# Altium PCB PCB1.PcbDoc
Units mm, origin at the board's own origin, x right, y up, seen from the top; angles counter-clockwise.
Board outline 75.18 x 42.29 mm, 2 copper layers (Top Layer, Bottom Layer); 11 components, 10 nets, 45 pads, 0 vias.
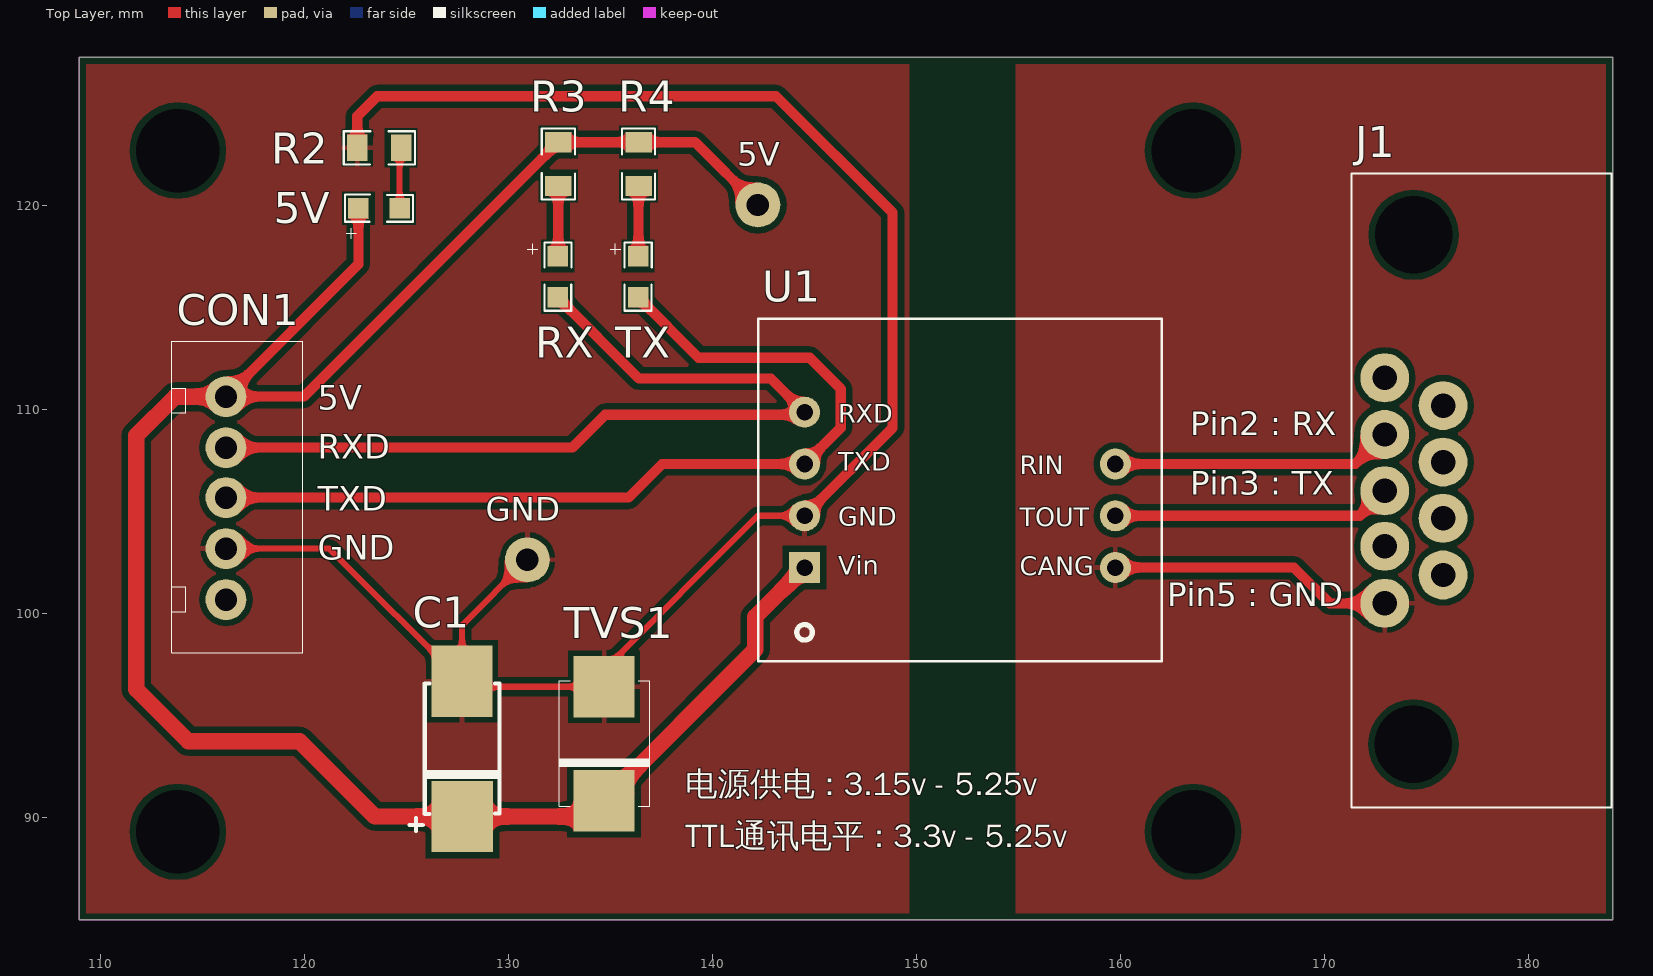
[diagram p0: Top Layer view]
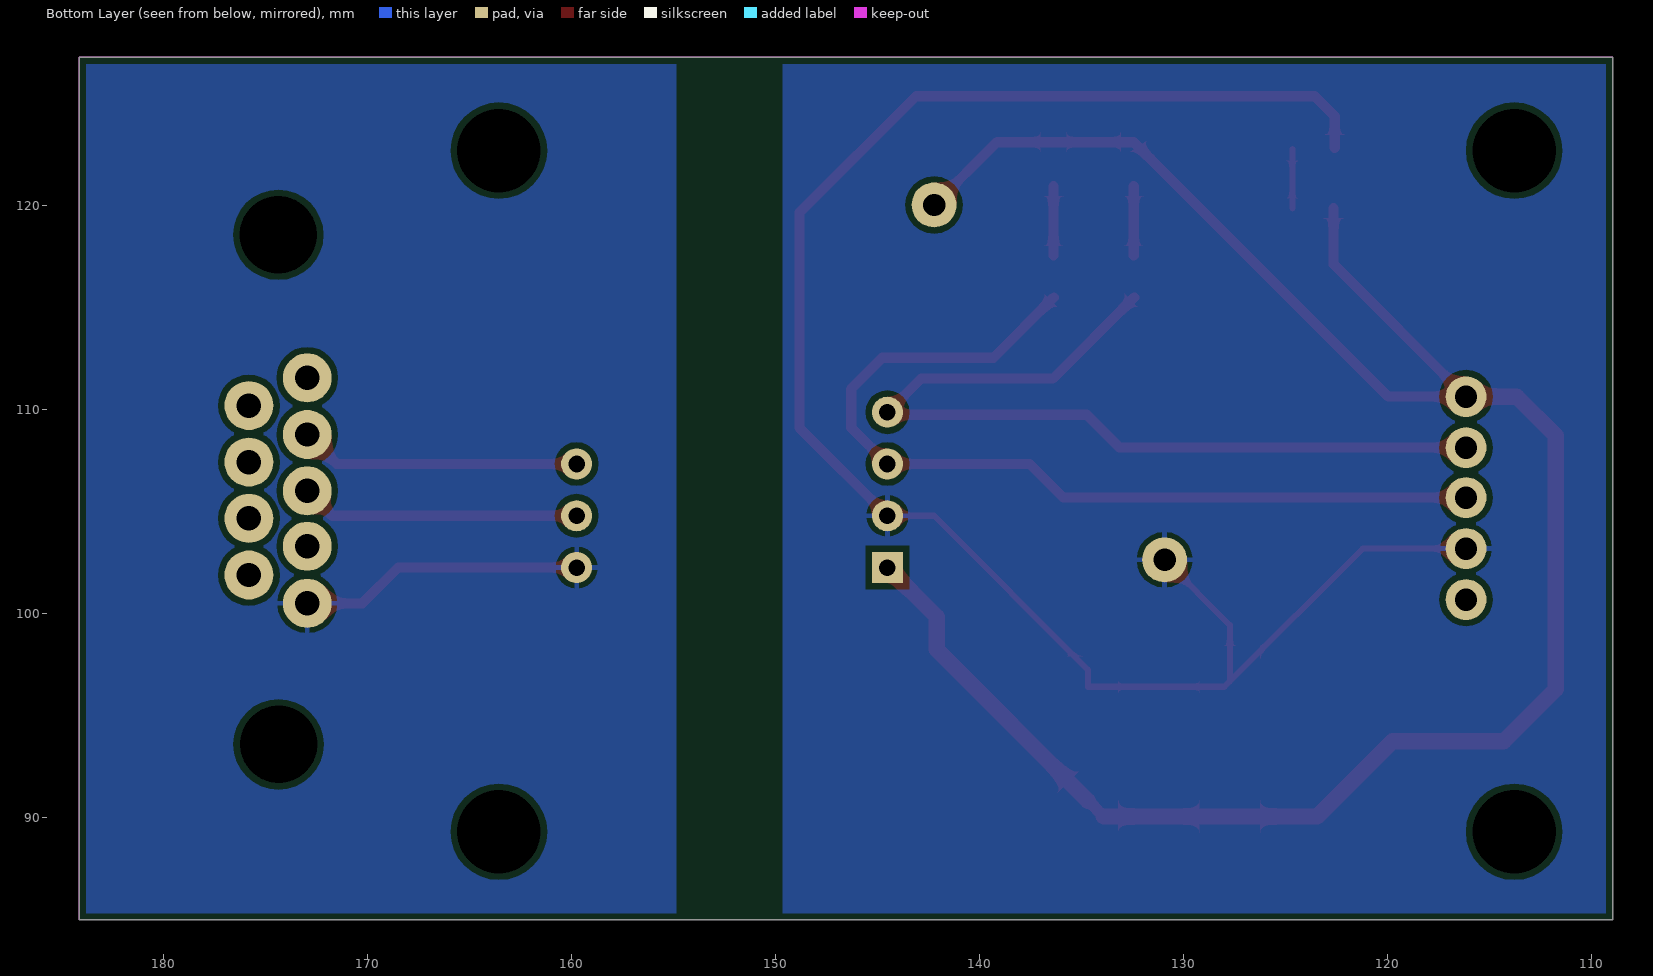
[diagram p1: Bottom Layer view, seen from below]
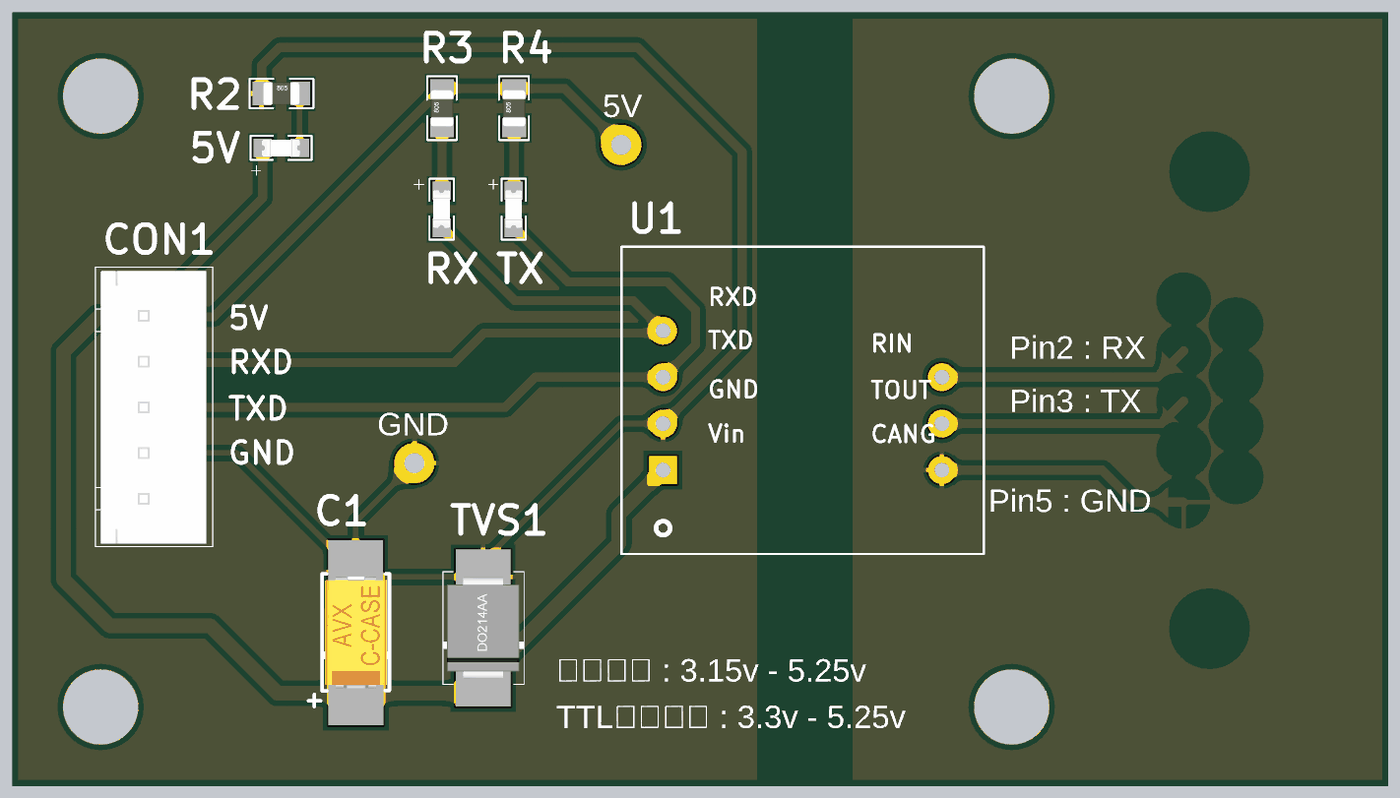
[diagram p2: 3D render of the assembled board from above, using the file's embedded part models]

## Layer stack, top to bottom
Top Solder: solder mask 0.0102, Solder Resist, Dk 3.5
Top Layer: signal copper 0.0356
Dielectric1: dielectric 0.32, FR-4, Dk 4.8
Bottom Layer: signal copper 0.0356
Bottom Solder: solder mask 0.0102, Solder Resist, Dk 3.5

## Board outline
108.966,84.963 184.15,84.963 184.15,127.254 108.966,127.254

## Design rules (kind name [scope] priority, off if disabled: settings)
AssemblyTestPointUsage AssemblyTestPointUsage_1 [All] p2:
AssemblyTestpoint AssemblyTestpoint_1 [All] p2: testpointundercomponent=TRUE minsize=1.016 maxsize=2.54 preferedsize=1.524 minholesize=0 maxholesize=1.016 preferedholesize=0.813 testpointgrid=0.025 usegrid=TRUE gridtolerance=0 allowsidetop=TRUE allowsidebottom=TRUE
Clearance [All] p1: gap=0.3
ComponentClearance ComponentClearance_1 [All] p2: gap=0.254 collisioncheckmode=3 verticalgap=0.254 showdistances=FALSE
DiffPairsRouting DiffPairsRouting_1 [All] p2: maxlimit=0.254 minlimit=0.254 mostfreqgap=0.254 toplayer_minwidth=0.381 toplayer_maxwidth=0.381 toplayer_prefwidth=0.381 bottomlayer_minwidth=0.381 bottomlayer_maxwidth=0.381 bottomlayer_prefwidth=0.381 maxuncoupledlength=12.7
FabricationTestPointUsage TestPointUsage [All] p2: valid=0 allowmultiple=FALSE
FabricationTestpoint Testpoint [All] p2: side=3 testpointundercomponent=TRUE minsize=1.016 maxsize=2.54 preferedsize=1.524 minholesize=0 maxholesize=1.016 preferedholesize=0.813 testpointgrid=0.025 allowsidetop=TRUE allowsidebottom=TRUE usegrid=TRUE gridtolerance=0
FanoutControl Fanout_LCC [IsLCC] p1: bgadir=Out bgaviamode=Centered fanoutstyle=Auto fanoutdirection=Alternating viagrid=0.025 // Fanout_LCC (Default Rule)
FanoutControl Fanout_BGA [IsBGA] p2: bgadir=Out bgaviamode=Centered fanoutstyle=Auto fanoutdirection=Alternating viagrid=0.025 // Fanout_BGA (Default Rule)
FanoutControl Fanout_Default [All] p4: bgadir=Out bgaviamode=Centered fanoutstyle=Auto fanoutdirection=Alternating viagrid=0.025 // Fanout_Default (Default Rule)
FanoutControl Fanout_Small [(CompPinCount < 5)] p5: bgadir=Out bgaviamode=Centered fanoutstyle=Auto fanoutdirection=OutThenIn viagrid=0.025 // Fanout_Small (Default Rule)
FanoutControl Fanout_BGA_1 [IsBGA] p6: bgadir=Out bgaviamode=Centered fanoutstyle=Auto fanoutdirection=Alternating viagrid=0.025 // Fanout_BGA (Default Rule)
FanoutControl Fanout_LCC_1 [IsLCC] p7: bgadir=Out bgaviamode=Centered fanoutstyle=Auto fanoutdirection=Alternating viagrid=0.025 // Fanout_LCC (Default Rule)
FanoutControl Fanout_SOIC_1 [IsSOIC] p8: bgadir=Out bgaviamode=Centered fanoutstyle=Auto fanoutdirection=Alternating viagrid=0.025 // Fanout_SOIC (Default Rule)
FanoutControl Fanout_Small_1 [(CompPinCount < 5)] p9: bgadir=Out bgaviamode=Centered fanoutstyle=Auto fanoutdirection=OutThenIn viagrid=0.025 // Fanout_Small (Default Rule)
FanoutControl Fanout_Default_1 [All] p10: bgadir=Out bgaviamode=Centered fanoutstyle=Auto fanoutdirection=Alternating viagrid=0.025 // Fanout_Default (Default Rule)
Height Height_1 [All] p2: minheight=0 maxheight=25.4 prefheight=12.7
HoleSize HoleSize_1 [All] p2: absolutevalues=TRUE maxlimit=2.54 minlimit=0.025 maxpercent=80.000 minpercent=20.000
HoleToHoleClearance HoleToHoleClearance_1 [All] p2: gap=0.254 allowstackedmicrovias=TRUE
LayerPairs LayerPairs_1 [All] p2: enforce=TRUE
MinimumSolderMaskSliver MinimumSolderMaskSliver_1 [All] p2: minsoldermaskwidth=0.254
NetAntennae NetAntennae_1 [All] p2: netantennaetolerance=0
PasteMaskExpansion PasteMaskExpansion_1 [All] p2: expansion=0
PlaneClearance PlaneClearance_1 [All] p2: clearance=0.508
PolygonConnect [All] p1: connectstyle=Relief reliefconductorwidth=0.254 reliefentries=4 polygonreliefangle="90 Angle" airgapwidth=0.254
PolygonConnect PolygonConnect_1 [All] p2: connectstyle=Relief reliefconductorwidth=0.254 reliefentries=4 polygonreliefangle="90 Angle" airgapwidth=0.254
RoutingPriority RoutingPriority_1 [All] p2: routingpriority=0
RoutingTopology RoutingTopology_1 [All] p2: topology=Shortest
RoutingVias [All] p1: holewidth=0.8 width=1.6 viastyle="Through Hole" minholewidth=0.711 minwidth=1.27 maxholewidth=0.711 maxwidth=1.27
ShortCircuit ShortCircuit_1 [All] p2: allowed=FALSE
SilkToBoardRegionClearance SilkToBoardRegionClearance_1 [All] p2:
SilkToSilkClearance SilkToSilkClearance_1 [All] p2: silktosilkclearance=0.254
SilkToSolderMaskClearance SilkscreenOverComponentPads [IsPad] p2: minsilkscreentomaskgap=0.254 clearancetoexposedcopper=TRUE
SolderMaskExpansion [All] p1: expansion=0.102
SolderMaskExpansion SolderMaskExpansion_1 [All] p2: expansion=0.102
UnRoutedNet UnRoutedNet_1 [All] p2:
UnpouredPolygon UnpouredPolygon_1 [All] p2:
Width [All] p1: maxlimit=1 minlimit=0.3 preferedwidth=0.3 minimp=50.000000 maximp=50.000000 favimp=50.000000
26 further rules are at their usual default settings.

## Components (designator, comment, footprint, x,y, rotation, side; value= is the part's Value field where it differs from the comment)
5V "0805 green" "0805 LED" 123.698,119.253 r90 top (schematic designator LED2)
C1 "T491C226K025AT" T491C226K010AT 129.413,90.17 r90 top
CON1 "XH2.54-5" XH2.54-5 116.205,110.617 r0 top
J1 "5504F1-09S-02A-03" 5504F1-09S-02A-03 189.865,90.551 r90 top
R2 "0805 1.5K" "0805 Resistor" 123.571,123.571 r270 top (schematic designator Res2)
R3 "0805 5K" "0805 Resistor" 131.699,121.92 r0 top (schematic designator Res3)
R4 "0805 5K" "0805 Resistor" 135.636,121.92 r0 top (schematic designator Res4)
RX "0805 Yellow" "0805 LED" 131.826,116.459 r0 top (schematic designator LED3)
TVS1 "SMBJ5.0A" SMBJ5.0A 134.747,90.805 r90 top
TX "0805 Yellow" "0805 LED" 135.763,116.459 r0 top (schematic designator LED4)
U1 "RSM232" RSM232 152.146,106.045 r0 top

## Footprints (in the part's own frame and the unit in brackets; to place one, negate y for a bottom-side part, rotate by r counter-clockwise, add the part's x,y. Pads: shape width x height; smd on the part's side, far side on the other; paste and mask are expansions set on the pad)
"0805 LED" [mm]
  rect 1x1 smd: 1(0.6,1.05) 2(0.6,-0.975)
  silkscreen extent -0.06,-1.63 1.27,1.71, body extent 0.14,-0.98 1.05,1.08, height 0.85
"0805 Resistor" [mm]
  rect 1.3x1 smd: 1(0.75,1.175) 2(0.75,-0.975)
  silkscreen extent -0.06,-1.64 1.56,1.85, body extent 0.13,-0.9 1.38,1.1, height 0.78
5504F1-09S-02A-03 [mm] "D-Sub 连接器, 9 触点, 插座, DE, AMPLIMITE HD-20系列, 金属主体, 焊接"
  round 2.4 hole 1.2: 1(20.99,16.89) 2(18.21,16.89) 3(15.45,16.89) 4(12.73,16.89) 5(9.93,16.89) 6(19.63,14.03) 7(16.86,14.03) 8(14.1,14.03) 9(11.32,14.03)
  round 0 hole 3.8: 10(3.01,15.48) 11(28,15.47)
  silkscreen extent -0.07,5.76 31,18.53, body extent 0.05,-0.06 30.85,18.36, height 12.75
RSM232 [mil]
  rect 60x60 hole 32: 1(-300,-150)
  round 60 hole 32: 2(-300,-50) 3(-300,50) 4(-300,150) 6(300,50) 7(300,-50) 8(300,-150)
  silkscreen extent -390,-331 390,331
SMBJ5.0A [mm] "ESD 抑制器/TVS 二极管"
  rect 3x3 smd: 1(5.588,0.05) 2(0,0.05)
  silkscreen extent -0.28,-2.18 5.87,2.25, body extent 0,-1.92 5.59,2.02, height 2.7
T491C226K010AT [mm] "表面贴装钽电容, 22 μF, 10 V, T491 系列, ± 10%, 2312 [6032 公制]"
  rect 3.5x3 smd: 1(-0.14,1.67) 2(6.49,1.68)
  silkscreen extent -0.86,-0.19 6.39,4.26, body extent 0.14,-0.01 6.24,3.34, height 2.7
XH2.54-5 [mm]
  round 2 hole 1.1: 1(-0.05,0) 2(-0.05,-2.5) 3(-0.05,-4.95) 4(-0.05,-7.45) 5(-0.05,-9.95)
  silkscreen extent -2.7,-12.56 3.72,2.72, body extent -2.4,-12.4 3.35,2.5, height 8

## Part data
5V RX TX: library part "0805 LED"
C1: library part T491C226K010AT, "表面贴装钽电容, 22 μF, 10 V, T491 系列, ± 10%, 2312 [6032 公"
J1: "D-Sub 连接器, 9 触点, 插座, DE, AMPLIMITE HD-20系列, 金属主体, 焊接"
R2 R3 R4: library part "0805 Resistor"
TVS1: "ESD 抑制器/TVS 二极管"

## Free pads (board coordinates)
  round 1.8 hole 4.1: 54(113.792,122.682) 55(163.576,122.682) 56(163.576,89.281) 57(113.792,89.281)
  round 2.2 hole 1.1: 100(142.24,120.015) 101(130.937,102.616)

## Nets (pads, with @x,y where several pads share a name; then routed paths per layer and width w, separated by ;. In a path a pad name is that pad's centre, name@x,y a point inside that pad or via, vN(x,y) a via of type N, cw(c..) or ccw(c..) an arc to the next point about the centre after c; other vN are vias at no path point)
GND: C1.2 CON1.4 pad.101 R2.2 TVS1.1 U1.2 | length 89.6
  Top Layer w0.3: CON1.4 121.226,103.167 C1.2 ; pad.101 127.733,99.412 C1.2 ; U1.2 142.24,104.775 134.697,97.232 TVS1.1 128,96.393 C1.2
  Top Layer w0.5: R2.2 122.596,124.374 123.571,125.349 143.129,125.349 148.844,119.634 148.844,109.093 U1.2
NetCON1_2: CON1.2 RX.2 U1.4 | length 43.5
  Top Layer w0.5: CON1.2 133.136,108.117 134.747,109.728 U1.4@144.526,109.728 ; RX.2 136.404,111.506 142.875,111.506 U1.4
NetCON1_3: CON1.3 TX.2 U1.3 | length 45.3
  Top Layer w0.5: CON1.3 135.893,105.667 137.541,107.315 U1.3 146.304,109.093 146.304,110.998 144.78,112.522 139.325,112.522 TX.2
NetJ1_2: J1.2 U1.6 | length 13.8
  Top Layer w0.5: U1.6 171.529,107.315 J1.2
NetJ1_3: J1.3 U1.7 | length 13.7
  Top Layer w0.5: U1.7 171.749,104.775 J1.3
NetJ1_5: J1.5 U1.8 | length 13.9
  Top Layer w0.5: U1.8 168.529,102.235 170.283,100.481 J1.5
NetLED2_2: 5V.2 R2.1 | length 2.9
  Top Layer w0.3: 5V.2 R2.1@124.673,122.748
NetLED3_1: R3.2 RX.1 | length 3.4
  Top Layer w0.5: RX.1@132.449,117.532 R3.2
NetLED4_1: R4.2 TX.1 | length 3.4
  Top Layer w0.5: TX.1@136.386,117.532 R4.2
"VCC5V & 3.3V": 5V.1 C1.1 CON1.1 pad.100 R3.1 R4.1 TVS1.2 U1.1 | length 103.4
  Top Layer w0.5: 5V.1 122.648,117.11 CON1.1 119.971,110.617 R3.1 R4.1 139.16,123.095 pad.100 ; TVS1.2@133.922,90.03 TVS1.2
  Top Layer w0.8: CON1.1 113.665,110.617 111.76,108.712 111.76,96.266 114.3,93.726 119.761,93.726 123.457,90.03 C1.1 TVS1.2@133.922,90.03 ; TVS1.2 142.113,98.221 142.113,99.822 U1.1
pads on no net: CON1.5 J1.1 J1.4 J1.6 J1.7 J1.8 J1.9 J1.10 J1.11

## Polygon pours and split planes (outlines as drawn)
GND on Top Layer "GND_L01_P014" (solid, remove dead copper, pour order 14): 108.966,127.254 149.987,127.254 149.987,84.963 108.966,84.963 108.966,127.254
NetJ1_5 on Top Layer "NETJ1_5_L01_P020" (solid, remove dead copper, pour order 20): 154.559,127.254 184.15,127.254 184.15,84.963 154.559,84.963 154.559,127.254
GND on Bottom Layer "GND_L02_P016" (solid, remove dead copper, pour order 16): 108.966,127.254 149.987,127.254 149.987,84.963 149.86,84.836 108.839,84.836 108.966,84.963 108.966,127.254
NetJ1_5 on Bottom Layer "NETJ1_5_L02_P018" (solid, remove dead copper, pour order 18): 154.559,127.127 184.023,127.127 184.15,127.254 184.15,84.963 154.559,84.963 154.559,127.127 154.559,127.254

## Keep-outs
Keep-Out Layer:
  lines w0.05: 149.987,127.254 150.368,127.254 ; 154.559,127.254 154.686,127.254 ; 108.966,84.963 184.15,84.963 184.15,127.254 108.966,127.254 108.966,84.963

## Silkscreen, mask and mechanical layers (free items; w line width, h text height)
Top Overlay:
  lines w0.05: 122.047,118.618 122.555,118.618 122.301,118.618 122.301,118.872 122.301,118.364 ; 130.937,117.856 131.445,117.856 131.191,117.856 131.191,118.11 131.191,117.602 ; 135.001,117.856 135.509,117.856 135.255,117.856 135.255,118.11 135.255,117.602
  text "5V" at 141.224,121.539 h2
  text "5V" at 120.65,109.982 h1.2
  text "Pin2 : RX" at 163.449,108.331 h2
  text "RXD" at 120.65,107.569 h1.2
  text "Pin3 : TX" at 163.449,105.41 h2
  text "TXD" at 120.65,105.029 h1.2
  text "GND" at 128.905,104.14 h2
  text "GND" at 120.65,102.616 h1.2
  text "Pin5 : GND" at 162.306,99.949 h2
  text "电源供电 : 3.15v - 5.25v" at 138.684,90.678 h2
  text "TTL通讯电平 : 3.3v - 5.25v" at 138.684,88.138 h2
Mechanical 16:
  drawing of 1873 lines, arcs and shapes, not listed
  text "1" at 36.246,189.611 h1.78
  text "2" at 108.89,189.611 h1.78
  text "3" at 182.042,189.611 h1.78
  text "4" at 254.94,189.611 h1.78
  text "A" at 1.905,166.599 h1.78
  text "A" at 288.925,166.599 h1.78
  text "B" at 1.905,118.542 h1.78
  text "B" at 288.925,118.542 h1.78
  text "C" at 1.905,70.028 h1.78
  text "ENGINEER:" at 173.99,33.02 h1.14
  text "TITLE:" at 212.09,33.02 h1.14
  text "PCB DESIGNER:" at 173.99,25.527 h1.14
  text "D" at 1.905,22.022 h1.78
  text "D" at 288.925,22.022 h1.78
  text "DATE:" at 173.99,17.78 h1.14
  text "PART NO.:" at 212.09,17.78 h1.14
  text "REV:" at 265.43,17.78 h1.14
  text "Altium Limited" at 140.97,15.24 h1.78
  text ".PRINT_DATE" at 175.26,14.732 h1.78
  text "12a Rodborough Rd" at 140.97,12.7 h1.78
  text "Frenchs Forest" at 140.97,10.16 h1.78
  text "FILE NAME:" at 173.99,10.16 h1.14
  text "DWG NO:" at 212.09,10.16 h1.14
  text "SCALE:" at 265.43,10.16 h1.14
  text "NSW 2086" at 140.97,7.62 h1.78
  text ".PCB_FILE_NAME_NO_PATH" at 175.26,7.112 h1.78
  text "1" at 36.246,1.651 h1.78
  text "2" at 108.89,1.651 h1.78
  text "3" at 182.042,1.651 h1.78
  text "4" at 254.94,1.651 h1.78

## Text inside footprints (layer, text, board x,y; h text height)
U1: Top Overlay "RIN" at 155.067,106.807 h0.91; Top Overlay "TOUT" at 155.067,104.267 h0.91; Top Overlay "Vin" at 146.177,101.879 h0.91; Top Overlay "GND" at 146.177,104.292 h0.91; Top Overlay "TXD" at 146.177,106.985 h0.91; Top Overlay "RXD" at 146.177,109.347 h0.91; Top Overlay "CANG" at 155.067,101.854 h0.91